# Altium PCB PlacaAmp25W.PcbDoc
Units mm, origin at the board's own origin, x right, y up, seen from the top; angles counter-clockwise.
Board outline 149.86 x 68.58 mm, 2 copper layers (Top Layer, Bottom Layer); 54 components, 31 nets, 130 pads, 22 vias.
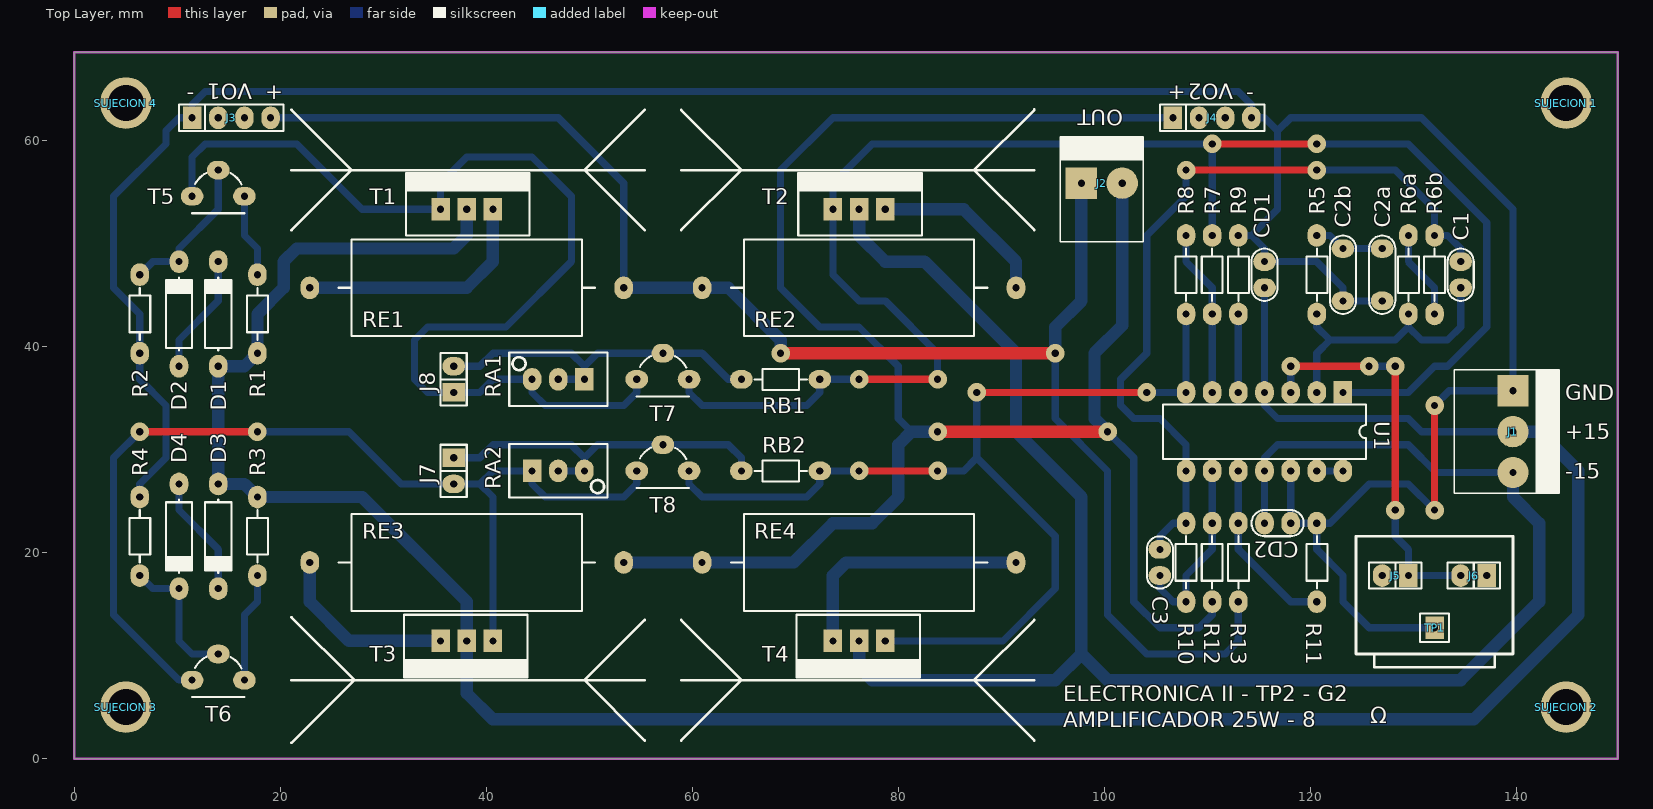
[diagram p0: Top Layer view]
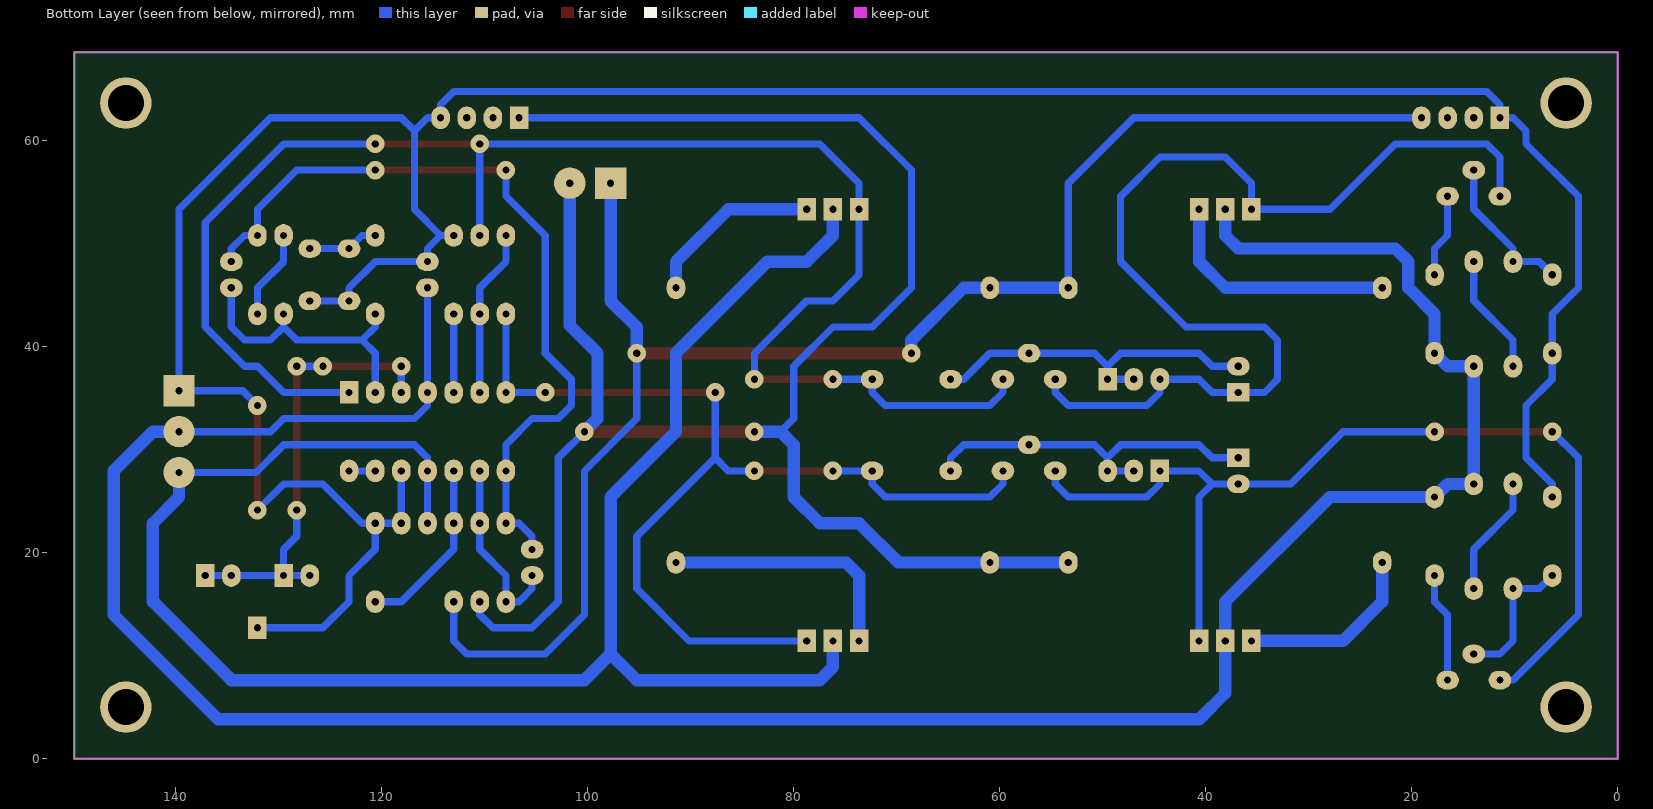
[diagram p1: Bottom Layer view, seen from below]
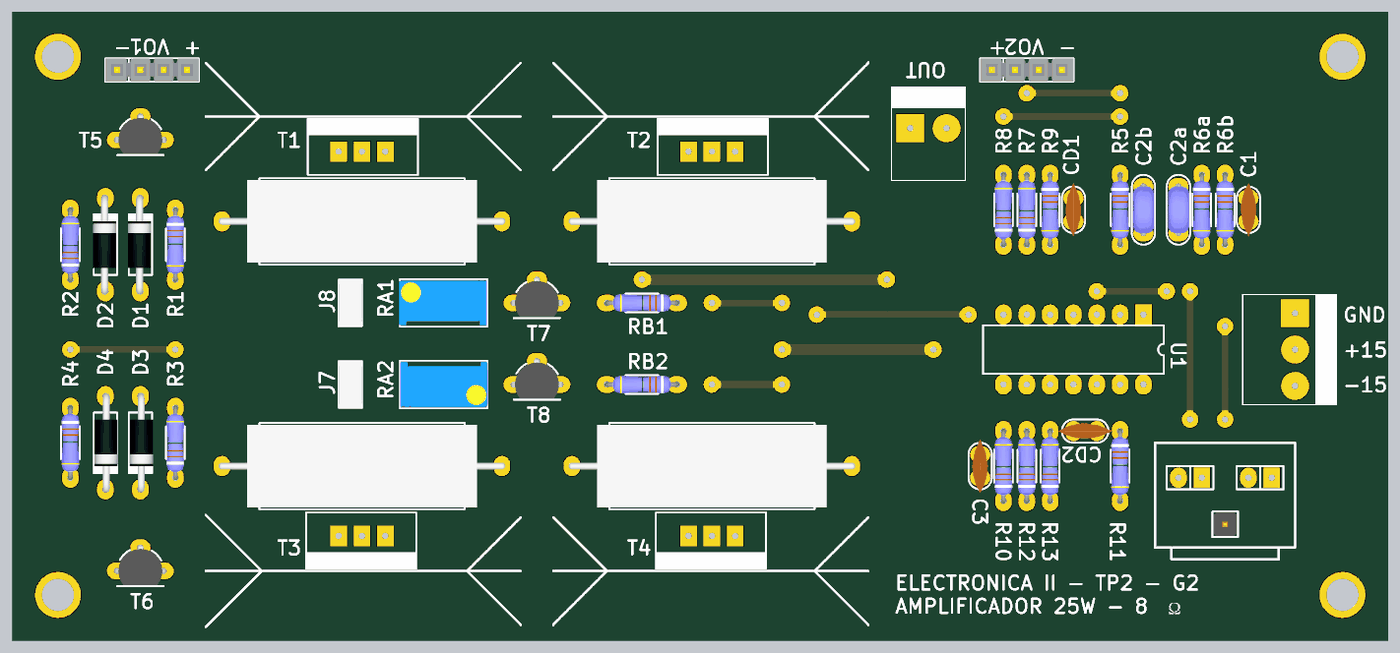
[diagram p2: 3D render of the assembled board from above, using the file's embedded part models]

## Layer stack, top to bottom
Top Solder: solder mask 0.0102, Solder Resist, Dk 3.5
Top Layer: signal copper 0.0356
Dielectric 1: dielectric 0.32, FR-4, Dk 4.8
Bottom Layer: signal copper 0.0356
Bottom Solder: solder mask 0.0102, Solder Resist, Dk 3.5

## Board outline
0,0 0,68.58 149.86,68.58 149.86,0

## Design rules (kind name [scope] priority, off if disabled: settings)
Clearance [All] p1: gap=0.7
PolygonConnect [All] p1: connectstyle=Relief reliefconductorwidth=0.254 reliefentries=4 polygonreliefangle="90 Angle" airgapwidth=0.254
RoutingVias [All] p1: holewidth=0.7 width=1.8 viastyle="Through Hole" minholewidth=0.7 minwidth=1.8 maxholewidth=0.7 maxwidth=1.8
SolderMaskExpansion [All] p1: expansion=0.102
Width [All] p1: maxlimit=1.2 minlimit=0.7 preferedwidth=0.7
30 further rules are at their usual default settings.

## Components (designator, comment, footprint, x,y, rotation, side; value= is the part's Value field where it differs from the comment)
C1 "33p" CAP100 134.62,46.99 r270 top
C2a "470n" CAP200 127,46.99 r90 top
C2b "470n" CAP200 123.19,46.99 r90 top
C3 "1n" CAP100 105.41,19.05 r90 top
CD1 "100n" CAP100 115.57,46.99 r90 top
CD2 "100n" CAP100 116.84,22.86 r0 top
D1 "1N4148" DO41 13.97,43.18 r90 top
D2 "1N4148" DO41 10.16,43.18 r90 top
D3 "1N4148" DO41 13.97,21.59 r270 top
D4 "1N4148" DO41 10.16,21.59 r270 top
J1 "FUENTE" "CONECTOR PASO 0.156\" 3 PINES" 139.7,31.75 r270 top
J2 "RL" "CONECTOR PASO 0.156\" 2 PINES" 97.79,55.88 r0 top
J3 "VO1" SIP4 15.24,62.23 r0 top
J4 "VO2" SIP4 110.49,62.23 r0 top
J5 "IN_R" SIP2 128.27,17.78 r180 top
J6 "IN_L" SIP2 135.89,17.78 r180 top
J7 "JUMPER" JUMPER2 36.83,27.94 r270 top
J8 "JUMPER" JUMPER2 36.83,36.83 r90 top
R1 "270" RES300 17.78,46.99 r270 top
R2 "4K7" RES300 6.35,39.37 r90 top
R3 "270" RES300 17.78,17.78 r90 top
R4 "4K7" RES300 6.35,25.4 r270 top
R5 "10K" RES300 120.65,50.8 r270 top
R6a "10K" RES300 129.54,50.8 r270 top
R6b "180K" RES300 132.08,50.8 r270 top
R7 "10K" RES300 110.49,43.18 r90 top
R8 "10K" RES300 107.95,43.18 r90 top
R9 "4K7" RES300 113.03,50.8 r270 top
R10 "1K" RES300 107.95,15.24 r90 top
R11 "1K" RES300 120.65,22.86 r270 top
R12 "2K2" RES300 110.49,15.24 r90 top
R13 "2K2" RES300 113.03,15.24 r90 top
RA1 "10K" "PRESET V" 46.99,36.83 r180 top
RA2 "10K" "PRESET V" 46.99,27.94 r0 top
RB1 "2K7" RES300 72.39,36.83 r180 top
RB2 "2K7" RES300 72.39,27.94 r180 top
RE1 "0.33" RES1200 38.1,45.72 r180 top
RE2 "0.33" RES1200 76.2,45.72 r180 top
RE3 "0.33" RES1200 38.1,19.05 r180 top
RE4 "0.33" RES1200 76.2,19.05 r180 top
"SUJECION 1" "SUJECION" "SUJECION (5.00MM - 3.50MM)" 144.86,63.66 r90 top
"SUJECION 2" "SUJECION" "SUJECION (5.00MM - 3.50MM)" 144.86,5 r90 top
"SUJECION 3" "SUJECION" "SUJECION (5.00MM - 3.50MM)" 5,5 r90 top
"SUJECION 4" "SUJECION" "SUJECION (5.00MM - 3.50MM)" 5,63.66 r90 top
T1 "TIP122" "TO-220 V" 38.1,53.34 r0 top
T2 "TIP127" "TO-220 V" 76.2,53.34 r0 top
T3 "TIP122" "TO-220 V" 38.1,11.43 r180 top
T4 "TIP127" "TO-220 V" 76.2,11.43 r180 top
T5 "BC327" TO92 13.97,55.88 r180 top
T6 "BC327" TO92 13.97,8.89 r180 top
T7 "BC337" TO92 57.15,38.1 r180 top
T8 "BC337" TO92 57.15,29.21 r180 top
TP1 "TP" TPTH 132.08,12.7 r90 top
U1 "TL084N" N014 115.57,31.75 r180 top

## Footprints (in the part's own frame and the unit in brackets; to place one, negate y for a bottom-side part, rotate by r counter-clockwise, add the part's x,y. Pads: shape width x height; smd on the part's side, far side on the other; paste and mask are expansions set on the pad)
CAP100 [mm]
  oval 1.8x2.2 hole 0.7: 1(-1.27,0) 2(1.27,0)
  silkscreen extent -2.54,-1.27 2.54,1.27, body extent -2.92,-0.84 2.92,0.86, height 6.12
CAP200 [mm]
  oval 1.8x2.2 hole 0.7: 1(-2.54,0) 2(2.54,0)
  silkscreen extent -3.81,-1.27 3.81,1.27, body extent -2.79,-1.17 2.79,1.12, height 6.24
"CONECTOR PASO 0.156\" 2 PINES" [mil]
  rect 120x120 hole 27.56: 1(0,0)
  round 120 hole 27.56: 2(156,0)
  silkscreen extent -80,-225 236,177
"CONECTOR PASO 0.156\" 3 PINES" [mil]
  rect 120x120 hole 27.56: 1(-156,0)
  round 120 hole 27.56: 2(0,0) 3(156,0)
  silkscreen extent -236,-225 236,177
DO41 [mm]
  oval 2.2x1.8 hole 0.7: 1(-5.08,0) 2(5.08,0)
  silkscreen extent -3.56,-1.27 3.56,1.27, body extent -5.46,-1.19 5.46,1.37, height 2.03
JUMPER2 [mm]
  rect 1.8x2.2 hole 0.7: 1(-1.27,0)
  oval 1.8x2.2 hole 0.7: 2(1.27,0)
  silkscreen extent -2.54,-1.27 2.54,1.27, body extent -2.46,-1.27 2.54,1.27, height 9.5
N014 [mm] "DIP; 14 Leads; Row Spacing 7.62 mm; Pitch 2.54 mm"
  rect 1.8x2.2 hole 0.7: 1(-7.62,-3.81)
  oval 1.8x2.2 hole 0.7: 2(-5.08,-3.81) 3(-2.54,-3.81) 4(0,-3.81) 5(2.54,-3.81) 6(5.08,-3.81) 7(7.62,-3.81) 8(7.62,3.81) 9(5.08,3.81) 10(2.54,3.81) 11(0,3.81) 12(-2.54,3.81) 13(-5.08,3.81) 14(-7.62,3.81)
  silkscreen extent -9.85,-2.65 9.85,2.65
"PRESET V" [mm]
  rect 1.8x2.2 hole 0.7: 1(-2.54,0)
  oval 1.8x2.2 hole 0.7: 2(0,0) 3(2.54,0)
  silkscreen extent -4.76,-2.6 4.76,2.6, body extent -4.7,-2.42 4.83,2.42, height 11.55
RES300 [mm]
  oval 2.2x1.8 hole 0.7: 1(0,0) 2(7.62,0)
  silkscreen extent 1.27,-1.02 6.35,1.02, body extent -0.25,-0.97 7.87,0.97, height 2.01
RES1200 [mm]
  oval 1.8x2.2 hole 0.7: 1(-15.24,0) 2(15.24,0)
  silkscreen extent -12.45,-4.7 12.45,4.7, body extent -15.62,-4.5 15.61,4.5, height 9.51
SIP2 [mm]
  rect 1.8x2.2 hole 0.7: 1(-1.27,0)
  oval 1.8x2.2 hole 0.7: 2(1.27,0)
  silkscreen extent -2.54,-1.27 2.54,1.27
SIP4 [mm]
  rect 1.8x2.2 hole 0.7: 1(-3.81,0)
  oval 1.8x2.2 hole 0.7: 2(-1.27,0) 3(1.27,0) 4(3.81,0)
  silkscreen extent -5.08,-1.27 5.08,1.27, body extent -5.08,-1.27 5.08,1.27, height 8.38
"SUJECION (5.00MM - 3.50MM)" [mm]
  round 5 hole 3.5: 1(0,0)
TO92 [mm]
  oval 2.2x1.8 hole 0.7: 1(0,-1.27) 2(2.54,1.27) 3(-2.54,1.27)
  silkscreen extent -2.54,-1 2.54,2.92, body extent -2.79,-1.55 2.79,2.79, height 8
"TO-220 V" [mm]
  rect 1.8x2.2 hole 0.7: 1(-2.54,0) 2(0,0) 3(2.54,0)
  silkscreen extent -5.9,-2.54 6.1,3.54, body extent -5,-2 5,3, height 18
TPTH [mm]
  rect 2.2x1.8 hole 0.7: 1(0,0)
  silkscreen extent -1.4,-1.4 1.4,1.4, body extent -1.27,-1.27 1.27,1.27, height 6.04

## Part data
C1 C2a C2b C3 CD1 CD2: library part CAP
D1 D2 D3 D4: library part "DIODO SCHOTTKY"
J1: library part CON3
J2 J5 J6: library part CON2
J3 J4: library part CON4
R1 R2 R3 R4 R5 R6a R6b R7 R8 R9 R10 R11 R12 R13 RB1 RB2 RE1 RE2 RE3 RE4: library part RES
RA1 RA2: library part PRESET
T1 T3 T7 T8: library part "TRANSISTOR NPN"
T2 T4 T5 T6: library part "TRANSISTOR PNP"
U1: "JFET-Input Operational Amplifier"

## Via types
v1: diameter 1.8, hole 0.7, Top Layer to Bottom Layer, 22 vias

## Nets (pads, with @x,y where several pads share a name; then routed paths per layer and width w, separated by ;. In a path a pad name is that pad's centre, name@x,y a point inside that pad or via, vN(x,y) a via of type N, cw(c..) or ccw(c..) an arc to the next point about the centre after c; other vN are vias at no path point)
GND: C2a.1 C2b.1 CD1.2 CD2.2 J1.1 J3.1 J4.4 R2.1 R4.1 R9.1 R11.1 TP1.1 U1.12 | length 286.1
  Top Layer w0.7: v1(132.08,24.13) v1(132.08,34.29)
  Bottom Layer w0.7: R4.1 6.35,26.67 8.89,29.21 8.89,34.29 6.35,36.83 R2.1 6.35,43.18 3.81,45.72 3.81,54.61 8.89,59.69 8.89,60.96 10.16,62.23 J3.1 11.43,63.5 12.7,64.77 113.03,64.77 114.3,63.5 J4.4 115.57,62.23 116.84,60.96 ; R9.1 114.3,50.8 ; U1.12 CD2.2 R11.1 ; C2a.1 C2b.1 123.19,45.72 120.65,48.26 CD1.2 115.57,49.53 114.3,50.8 ; TP1.1 125.73,12.7 123.19,15.24 123.19,17.78 120.65,20.32 R11.1 ; v1(132.08,24.13) 129.54,26.67 125.73,26.67 121.92,22.86 R11.1 ; v1(132.08,34.29) 133.502,35.712 J1.1 139.7,53.34 130.81,62.23 118.11,62.23 116.84,60.96 ; 114.3,50.8 116.84,53.34 116.84,60.96
NetC1_2: C1.2 R5.2 R6a.2 U1.2 | length 28
  Bottom Layer w0.7: U1.2 120.65,39.37 121.92,40.64 ; R5.2 120.65,41.91 121.92,40.64 ; R6a.2 129.54,41.91 ; C1.2 134.62,41.91 133.35,40.64 130.81,40.64 129.54,41.91 ; 121.92,40.64 128.27,40.64 129.54,41.91
NetC2a_2: C2a.2 C2b.2 R5.1 | length 6.9
  Bottom Layer w0.7: R5.1 121.92,50.8 C2b.2 C2a.2
NetC3_1: C3.1 R10.1 R12.2 U1.9 | length 18.1
  Bottom Layer w0.7: C3.1 105.41,16.51 106.68,15.24 R10.1 107.95,17.78 110.49,20.32 R12.2 U1.9
NetD1_2: D1.2 D2.1 | length 11.7
  Bottom Layer w0.7: D2.1 10.16,40.64 13.97,44.45 D1.2
NetD2_2: D2.2 R2.2 T5.1 | length 14.8
  Bottom Layer w0.7: R2.2 7.62,48.26 D2.2 10.16,49.53 13.97,53.34 T5.1
NetD3_2: D3.2 D4.1 | length 11.7
  Bottom Layer w0.7: D4.1 10.16,24.13 13.97,20.32 D3.2
NetD4_2: D4.2 R4.2 T6.1 | length 13.8
  Bottom Layer w0.7: R4.2 7.62,16.51 D4.2 10.16,11.43 11.43,10.16 T6.1
NetJ5_1: J5.1 J5.2 J6.1 J6.2 U1.3 | length 43.7
  Top Layer w0.7: v1(118.11,38.1) v1(125.73,38.1) ; v1(128.27,24.13) v1(128.27,38.1)
  Bottom Layer w0.7: U1.3 v1(118.11,38.1) ; v1(125.73,38.1) v1(128.27,38.1) ; J5.2 J5.1 ; v1(128.27,24.13) 128.27,21.59 129.54,20.32 J5.1 ; J6.1 J6.2 J5.1
NetJ7_1: J7.1 RA2.2 RA2.3 RB2.2 T8.1 | length 35.1
  Bottom Layer w0.7: J7.1 39.37,29.21 40.64,30.48 48.26,30.48 49.53,29.21 ; RA2.2 RA2.3 49.53,29.21 ; RB2.2 64.77,29.21 63.5,30.48 T8.1 50.8,30.48 49.53,29.21
NetJ7_2: J7.2 RA2.1 T3.1 T6.2 T8.2 | length 99.3
  Top Layer w0.7: v1(6.35,31.75) v1(17.78,31.75)
  Bottom Layer w0.7: v1(6.35,31.75) 3.81,29.21 3.81,13.97 10.16,7.62 T6.2 ; v1(17.78,31.75) 26.67,31.75 31.75,26.67 J7.2 39.37,26.67 ; T3.1 40.64,25.4 39.37,26.67 ; T8.2 54.61,26.67 53.34,25.4 45.72,25.4 44.45,26.67 RA2.1 40.64,27.94 39.37,26.67
NetJ8_1: J8.1 RA1.3 T1.1 T5.2 T7.2 | length 103.8
  Bottom Layer w0.7: T5.2 11.43,58.42 12.7,59.69 21.59,59.69 27.94,53.34 T1.1 35.56,55.88 38.1,58.42 44.45,58.42 48.26,54.61 48.26,48.26 41.91,41.91 34.29,41.91 33.02,40.64 33.02,36.83 34.29,35.56 J8.1 39.37,35.56 40.64,36.83 RA1.3 44.45,35.56 45.72,34.29 53.34,34.29 54.61,35.56 T7.2
NetJ8_2: J8.2 RA1.1 RA1.2 RB1.2 T7.1 | length 34.4
  Bottom Layer w0.7: J8.2 39.37,38.1 40.64,39.37 48.26,39.37 49.53,38.1 ; RA1.2 RA1.1 49.53,38.1 ; RB1.2 63.5,36.83 60.96,39.37 T7.1 50.8,39.37 49.53,38.1
NetR1_1: R1.1 T5.3 | length 8.1
  Bottom Layer w0.7: T5.3 16.51,50.8 17.78,49.53 R1.1
NetR3_1: R3.1 T6.3 | length 10.7
  Bottom Layer w0.7: T6.3 16.51,13.97 17.78,15.24 R3.1
NetR6a_1: R6a.1 R6b.2 | length 8.7
  Bottom Layer w0.7: R6a.1 129.54,48.26 132.08,45.72 R6b.2
NetR7_1: R7.1 R8.2 U1.6 | length 16.3
  Bottom Layer w0.7: R8.2 107.95,48.26 110.49,45.72 R7.1 U1.6
NetR8_1: R8.1 RB2.1 T4.1 T8.3 U1.7 | length 100.8
  Top Layer w0.7: v1(76.2,27.94) v1(83.82,27.94) ; v1(87.63,35.56) v1(104.14,35.56)
  Bottom Layer w0.7: T8.3 59.69,26.67 60.96,25.4 71.12,25.4 72.39,26.67 RB2.1 v1(76.2,27.94) ; T4.1 90.17,11.43 95.25,16.51 95.25,21.59 87.63,29.21 ; v1(83.82,27.94) 86.36,27.94 87.63,29.21 ; v1(87.63,35.56) 87.63,29.21 ; v1(104.14,35.56) U1.7 R8.1
NetR9_2: R9.2 U1.5 | length 7.6
  Bottom Layer w0.7: U1.5 R9.2
NetR11_2: R11.2 R13.2 U1.10 | length 17.3
  Bottom Layer w0.7: U1.10 R13.2 113.03,20.32 118.11,15.24 R11.2
NetRE1_2: RE1.2 T1.3 | length 23.9
  Bottom Layer w1.2: RE1.2 38.1,45.72 40.64,48.26 T1.3
NetRE2_1: RE2.1 T2.3 | length 17.3
  Bottom Layer w1.2: T2.3 86.36,53.34 91.44,48.26 RE2.1
NetRE3_2: RE3.2 T3.3 | length 18.1
  Bottom Layer w1.2: RE3.2 22.86,15.24 26.67,11.43 T3.3
NetRE4_1: RE4.1 T4.3 | length 24.7
  Bottom Layer w1.2: T4.3 73.66,17.78 74.93,19.05 RE4.1
NetU1_13: U1.13 U1.14 | length 2.5
  Bottom Layer w0.7: U1.13 U1.14
OUT_SIG: R7.2 RB1.1 T2.1 T7.3 U1.1 | length 156.4
  Top Layer w0.7: v1(76.2,36.83) v1(83.82,36.83) ; v1(110.49,59.69) v1(120.65,59.69)
  Bottom Layer w0.7: T7.3 59.69,35.56 60.96,34.29 71.12,34.29 72.39,35.56 RB1.1 v1(76.2,36.83) ; v1(83.82,36.83) 83.82,39.37 78.74,44.45 76.2,44.45 73.66,46.99 T2.1 73.66,55.88 77.47,59.69 v1(110.49,59.69) R7.2 ; v1(120.65,59.69) 129.54,59.69 137.16,52.07 137.16,41.91 133.35,38.1 132.08,38.1 129.54,35.56 U1.1
VCC: CD1.1 D1.1 D3.1 J1.2 R1.2 R3.2 T1.2 T3.2 U1.4 | length 256.6
  Bottom Layer w0.7: CD1.1 U1.4 115.57,34.29 116.84,33.02 129.54,33.02 130.81,31.75 J1.2
  Bottom Layer w1.2: T1.2 38.1,50.8 36.83,49.53 21.59,49.53 20.32,48.26 20.32,45.72 17.78,43.18 R1.2 16.51,38.1 D1.1 D3.1 16.51,26.67 R3.2 27.94,25.4 38.1,15.24 T3.2 38.1,6.35 40.64,3.81 135.89,3.81 146.05,13.97 146.05,27.94 142.24,31.75 J1.2
VEE: CD2.1 J1.3 T2.2 T4.2 U1.11 | length 174.4
  Bottom Layer w0.7: CD2.1 U1.11 115.57,29.21 116.84,30.48 129.54,30.48 132.232,27.788 J1.3
  Bottom Layer w1.2: T4.2 76.2,8.89 77.47,7.62 95.25,7.62 97.79,10.16 ; T2.2 76.2,50.8 78.74,48.26 82.55,48.26 91.44,39.37 91.44,31.75 97.79,25.4 97.79,10.16 ; J1.3 139.7,25.4 142.24,22.86 142.24,15.24 134.62,7.62 100.33,7.62 97.79,10.16
VO1: J2.1 J3.4 R13.1 RE1.1 RE2.2 | length 156
  Top Layer w1.2: v1(68.58,39.37) v1(95.25,39.37)
  Bottom Layer w0.7: J3.4 46.99,62.23 53.34,55.88 RE1.1 ; v1(95.25,39.37) 95.25,33.02 100.33,27.94 100.33,13.97 104.14,10.16 111.76,10.16 113.03,11.43 R13.1
  Bottom Layer w1.2: RE1.1 RE2.2 63.5,45.72 68.58,40.64 v1(68.58,39.37) ; v1(95.25,39.37) 95.25,41.91 97.79,44.45 J2.1
VO2: J2.2 J4.1 R12.1 RE3.1 RE4.2 | length 182.1
  Top Layer w1.2: v1(83.82,31.75) v1(100.33,31.75)
  Bottom Layer w0.7: 81.28,31.75 80.01,33.02 80.01,38.1 76.2,41.91 72.39,41.91 68.58,45.72 68.58,57.15 73.66,62.23 J4.1 ; v1(100.33,31.75) 102.87,29.21 102.87,15.24 105.41,12.7 109.22,12.7 110.49,13.97 R12.1
  Bottom Layer w1.2: RE3.1 RE4.2 69.85,19.05 73.66,22.86 77.47,22.86 80.01,25.4 80.01,30.48 81.28,31.75 v1(83.82,31.75) ; v1(100.33,31.75) 99.06,33.02 99.06,39.37 101.752,42.062 J2.2
VO_DIF: C1.1 C3.2 R6b.1 R10.2 U1.8 | length 78
  Top Layer w0.7: v1(107.95,57.15) v1(120.65,57.15)
  Bottom Layer w0.7: C3.2 105.41,21.59 106.68,22.86 R10.2 U1.8 107.95,30.48 105.41,33.02 102.87,33.02 101.6,34.29 101.6,36.83 104.14,39.37 104.14,50.8 107.95,54.61 v1(107.95,57.15) ; v1(120.65,57.15) 128.27,57.15 132.08,53.34 R6b.1 133.35,50.8 134.62,49.53 C1.1
pads on no net: "SUJECION 1.1" "SUJECION 2.1" "SUJECION 3.1" "SUJECION 4.1" J3.2 J3.3 J4.2 J4.3

## Keep-outs
Keep-Out Layer:
  the board outline again, w0.254

## Silkscreen, mask and mechanical layers (free items; w line width, h text height)
Top Overlay:
  lines w0.254: 21.082,1.524 27.178,7.62 21.082,13.716 ; 21.082,7.62 55.372,7.62 ; 21.082,51.308 26.924,57.15 21.082,62.992 ; 21.082,57.15 55.372,57.15 ; 55.372,1.716 55.372,1.778 49.53,7.62 55.372,13.462 ; 55.372,51.308 49.53,57.15 55.372,62.992 ; 58.928,1.716 58.928,1.778 64.77,7.62 58.928,13.462 ; 58.928,7.62 93.218,7.62 ; 58.928,51.308 64.77,57.15 58.928,62.992 ; 58.928,57.15 93.218,57.15 ; 93.218,1.716 93.218,1.778 87.376,7.62 93.218,13.462 ; 93.218,51.308 87.376,57.15 93.218,62.992 93.218,63.054 ; 126.238,10.16 126.238,8.89 137.922,8.89 137.922,10.16 ; 124.46,10.16 124.46,21.59 139.7,21.59 139.7,10.16 124.46,10.16
  text "VO1" at 17.272,65.532 h1.52 r180
  text "VO2" at 112.522,65.532 h1.52 r180
  text "-" at 10.922,64.008 h1.52
  text "+" at 18.542,64.008 h1.52
  text "+" at 106.172,64.008 h1.52
  text "-" at 113.792,64.008 h1.52
  text "OUT" at 101.854,62.992 h1.52 r180
  text "GND" at 144.78,34.798 h1.52
  text "+15" at 144.78,30.988 h1.52
  text "-15" at 144.78,27.178 h1.52
  text "ELECTRONICA II - TP2 - G2" at 96.012,5.588 h1.52
  text "AMPLIFICADOR 25W - 8" at 96.012,3.048 h1.52
  text "Ω" at 125.847,2.921 h2.69